# Altium PCB Twitch_Switch_PCB.PcbDoc (part 3 of 3)
Units mil, origin at the board's own origin, x right, y up, seen from the top; angles counter-clockwise.
Board outline 3095 x 1923 mil, 2 copper layers (Top Layer, Bottom Layer); 103 components, 59 nets, 319 pads, 189 vias.
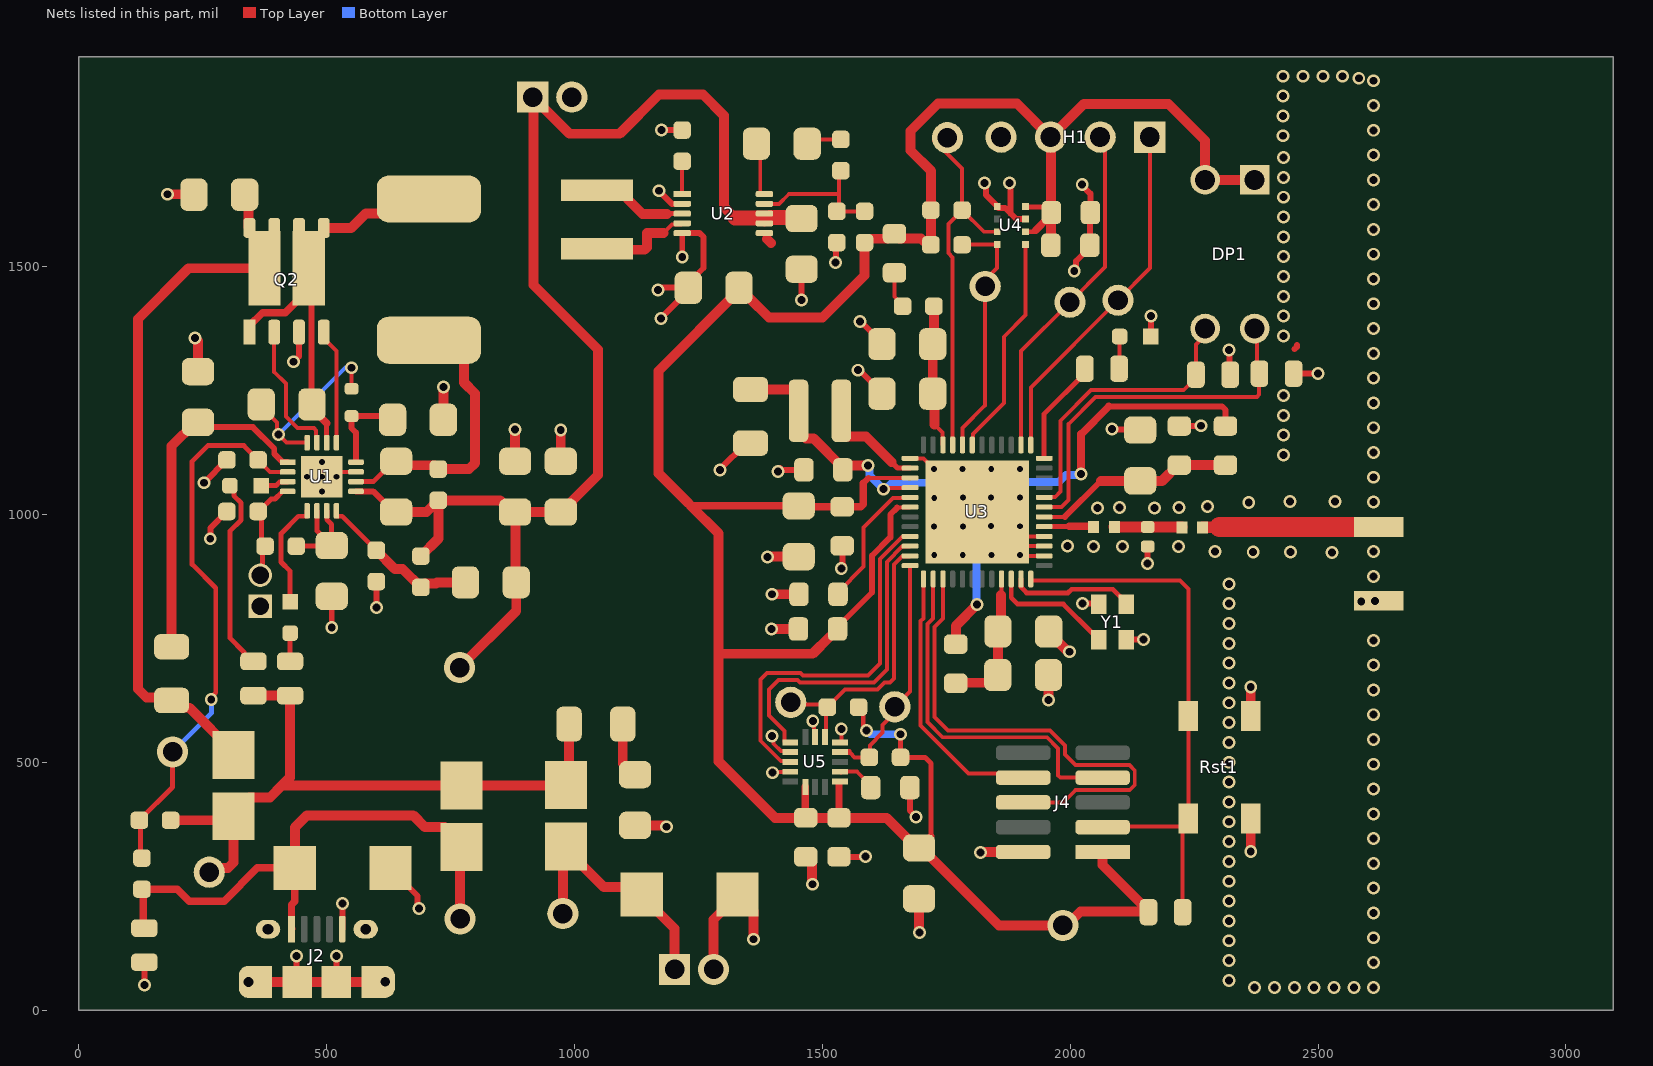
[diagram p2: the nets of this part, all layers, seen from the top]

## Part data (continued)
R23: library part RMCF0603JT1R00, "Res Thick Film 0603 1 Ohm 5% 0.1W(1/10W) ±200ppm/C Molded SMD Paper T/R", Case Code (Imperial)=0603, Case Code (Metric)=1608, Manufacturer="Stackpole Electronics", Max Operating Temperature=155°C, Max Power Dissipation=100mW, Min Operating Temperature=-55°C, Resistance=1R, Resistor Type="Thick Film", Temperature Coefficient=200ppm/°C, Tolerance=5%, Case/Package=0603, Category="Chip SMD Resistors", ComponentLink1Description=http://components.arrow.com/part/dataview/47073886S9848743N1174?src-supplier=Arrow+Electronics, ComponentLink1URL=http://components.arrow.com/part/dataview/47073886S9848743N1174?src-supplier=Arrow+Electronics, ComponentLink2Description=https://www.seielect.com/catalog/SEI-RMCF_RMCP.pdf?src-supplier=Avnet, ComponentLink2URL=https://www.seielect.com/catalog/SEI-RMCF_RMCP.pdf?src-supplier=Avnet, ComponentLink3Description=https://www.seielect.com/Catalog/SEI-RMCF_RMCP.pdf?src-supplier=Digi-Key, ComponentLink3URL=https://www.seielect.com/Catalog/SEI-RMCF_RMCP.pdf?src-supplier=Digi-Key, ComponentLink4Description=https://www.seielect.com/catalog/SEI-Packaging.pdf?src-supplier=Digi-Key, ComponentLink4URL=https://www.seielect.com/catalog/SEI-Packaging.pdf?src-supplier=Digi-Key, Construction=Rectangular, Contact Plating=Tin,Matte, Depth=0.8mm, Features="Automotive AEC-Q200", Height=0.022inch, Length=0.061inch, Manufacturer Part Number=RMCF0603JT1R00, Military Standard=Not, Mount="Surface Mount", Number of Terminations=2, Packaging="Tape and Reel", Pricing 1="1=0.10000, 10=0.02100, 100=0.00840, 1000=0.00379, 2500=0.00329 (USD)", Radiation Hardening=No, RoHS=Yes, RoHS Compliant=Yes, Series=RMCF, Stock 1=79282, Supplier 1=Digi-Key, Width=0.031inch
R25: library part 73L2R20J, "Res Thick Film 0603 0.2 Ohm 5% 1/10W ±300ppm/C Molded SMD SMD Paper T/R"
Rst1: library part PTS647SK38SMTR2LFS, "Switch Tactile N.O. SPST Round Button Gull Wing 0.05A 12VDC 100000Cycles 2.45N SMD T/R", Manufacturer="ITT C&K", Max Operating Temperature=70°C, Min Operating Temperature=-20°C, Operating Force=250gf, Ratings=IP40, Actuator Type=Standard, Category="Tactile Switches", ComponentLink1Description=https://www.ckswitches.com/media/2567/pts647.pdf?src-supplier=Digi-Key, ComponentLink1URL=https://www.ckswitches.com/media/2567/pts647.pdf?src-supplier=Digi-Key, Illumination Type=Non-Illuminated, Manufacturer Part Number=PTS647SK38SMTR2LFS, Mechanical Life=100000Cycles, Mount="Surface Mount", Packaging="Tape and Reel", Pricing 1="1=0.13000, 10=0.12700, 25=0.12080, 100=0.10970, 250=0.10308, 500=0.09432, 1000=0.07897 (USD)", RoHS=No, Stock 1=62118, Supplier 1=Digi-Key, Switch Function=Off-Mom, Switch Travel=0.25mm, Termination="Gull Wing", Throw Configuration=SPST
RT1: library part NTCLE101E3C90173, "THERM NTC 10KOHM 3435K RADIAL", Case/Package=Radial, Manufacturer="Vishay BCcomponents", Max Operating Temperature=125°C, Max Power Dissipation=250mW, Min Operating Temperature=-40°C, Tolerance=1%, Category=Thermistors, ComponentLink1Description=http://www.vishay.com/docs/29152/ntcle101e3c9017x.pdf?src-supplier=Digi-Key, ComponentLink1URL=http://www.vishay.com/docs/29152/ntcle101e3c9017x.pdf?src-supplier=Digi-Key, Manufacturer Part Number=NTCLE101E3C90173, Mount="Through Hole", Packaging=Bulk, Pricing 1="1=1.78000, 5=1.71600, 10=1.39500, 25=1.20160, 50=1.04060, 100=0.94400, 500=0.79384, 1000=0.70802, 5000=0.64365 (USD)", RoHS=Yes, RoHS Compliant=Yes, Stock 1=1784, Supplier 1=Digi-Key
U1: "High Efficiency Synchronous Switch-Mode Charger Controller – Solar Battery Charger 16-VQFN -40 to 85", Case/Package="VQFN EP", Manufacturer="Texas Instruments", Max Operating Temperature=85°C, Max Supply Voltage=28V, Min Input Voltage=5V, Min Operating Temperature=-40°C, Operating Supply Current=25mA, Output Current=10A, Output Voltage=26V, Package Quantity=3000, Switching Frequency=600kHz, Category="Battery Management", ComponentLink1Description=https://datasheet.ciiva.com/15115/getdatasheetpartid-517726-15115144.pdf?src-supplier=Verical, ComponentLink1URL=https://datasheet.ciiva.com/15115/getdatasheetpartid-517726-15115144.pdf?src-supplier=Verical, ComponentLink2Description=https://datasheet.ciiva.com/1934/bq24650-1934895.pdf?src-supplier=Digi-Key, ComponentLink2URL=https://datasheet.ciiva.com/1934/bq24650-1934895.pdf?src-supplier=Digi-Key, ComponentLink3Description=https://datasheet.ciiva.com/3214/bq24650-3214319.pdf?src-supplier=Avnet, ComponentLink3URL=https://datasheet.ciiva.com/3214/bq24650-3214319.pdf?src-supplier=Avnet, Contact Plating=Gold, Lead Free="Lead Free", Manufacturer Part Number=BQ24650RVAR, Min Supply Voltage=5V, Number of Cells=123456, Number of Pins=16, Packaging="Tape and Reel", Pricing 1="1=4.94000, 10=4.44000, 25=4.19760, 100=3.45140, 250=3.09688, 500=2.98496, 1000=2.48125 (USD)", Radiation Hardening=No, RoHS=Yes, RoHS Compliant=Yes, Series=-, Stock 1=7704, Supplier 1=Digi-Key
U2: "IC REG BUCK BST ADJ 0.6A 10MSOP", Case/Package=MSOP, Manufacturer="Analog Devices / Linear Technology", Max Operating Temperature=85°C, Min Input Voltage=2.5V, Min Operating Temperature=-40°C, Output Current=600mA, Output Voltage=5.5V, Package Quantity=2500, Switching Frequency=2MHz, Category="Voltage Regulators - Switching", ComponentLink1Description=https://datasheet.ciiva.com/26899/ltc3440ems-trpbf-26899120.pdf?src-supplier=IIIC, ComponentLink1URL=https://datasheet.ciiva.com/26899/ltc3440ems-trpbf-26899120.pdf?src-supplier=IIIC, ComponentLink2Description=https://datasheet.ciiva.com/2031/3314-2031816.pdf?src-supplier=Digi-Key, ComponentLink2URL=https://datasheet.ciiva.com/2031/3314-2031816.pdf?src-supplier=Digi-Key, Efficiency=96%, Lead Free="Lead Free", Manufacturer Part Number=LTC3440EMS#TRPBF, Number of Outputs=1, Number of Pins=10, Output Type=Adjustable, Packaging="Tape and Reel", Pricing 1="1=6.71000, 10=6.06200, 25=5.78000, 100=4.79330, 250=4.37040, 500=4.08842, 1000=3.72400 (USD)", RoHS=Yes, RoHS Compliant=Yes, Series=-, Stock 1=8435, Supplier 1=Digi-Key, Synchronous Rectifier=Yes
U3: library part EFR32BG13P732F512GM48-B_1, "BLUE PREMIUM QFN48 2.4G 19 DBM B", Current - Receiving=11mA, Current - Transmitting=8.5mA, Frequency=2.4GHz, Manufacturer="Silicon Labs", Manufacturer Part Number=EFR32BG13P732F512GM48-B, Max Operating Temperature=85°C, Min Operating Temperature=-40°C, Category="RF Receivers, Transceivers", ComponentLink1Description=https://www.silabs.com/documents/login/data-sheets/efr32bg13-datasheet.pdf?src-supplier=Digi-Key, ComponentLink1URL=https://www.silabs.com/documents/login/data-sheets/efr32bg13-datasheet.pdf?src-supplier=Digi-Key, Data Rate=2Mbps, Interface=I2C,UART,USART, Memory Size=64KB, Number of GPIO=31, Packaging=Tray, Pricing 1="1=6.48000, 25=6.24040, 100=6.00030, 1000=5.98905 (USD)", RoHS=Yes, RoHS Compliant=Yes, Sensitivity=-102dBm, Stock 1=19, Supplier 1=Digi-Key
U4: "INFINEON - DPS310XTSA1 - Pressure Sensor, Barometric, 17.404 psi, 4.351 psi, 1.7 V, 3.6 V", Case/Package=LGA, Manufacturer=Infineon, Max Operating Temperature=85°C, Max Supply Voltage=3.6V, Min Operating Temperature=-40°C, Operating Pressure=17.4PSI, Category="Pressure Sensors", ComponentLink1Description=http://www.farnell.com/datasheets/2211517.pdf?src-supplier=Farnell, ComponentLink1URL=http://www.farnell.com/datasheets/2211517.pdf?src-supplier=Farnell, ComponentLink2Description=https://www.infineon.com/dgdl/Infineon-DPS310-DS-v01_00-EN.pdf?fileId=5546d462576f34750157750826c42242&src-supplier=Digi-Key, ComponentLink2URL=https://www.infineon.com/dgdl/Infineon-DPS310-DS-v01_00-EN.pdf?fileId=5546d462576f34750157750826c42242&src-supplier=Digi-Key, ComponentLink3Description=http://www.farnell.com/datasheets/2211517.pdf?src-supplier=Newark, ComponentLink3URL=http://www.farnell.com/datasheets/2211517.pdf?src-supplier=Newark, ComponentLink4Description=http://www.farnell.com/datasheets/2211517.pdf?src-supplier=Element14, ComponentLink4URL=http://www.farnell.com/datasheets/2211517.pdf?src-supplier=Element14, Halogen Free="Halogen Free", Interface=I2C,SPI, Lead Free="Lead Free", Manufacturer Part Number=DPS310XTSA1, Max Pressure=145PSI, Number of Pins=8, Output Type=SPI,I2C, Pressure Type="Vented Gauge", Pricing 1="1=2.89000, 5=2.68200, 10=2.22800, 25=1.85640, 50=1.65000, 100=1.56750, 500=1.32000, 1000=1.23750 (USD)", RoHS=Yes, RoHS Compliant=Yes, Stock 1=17160, Supplier 1=Digi-Key, Termination=SMD/SMT
U5: "Accelerometer Triple ±2g/±4g/±8g 2.5V 16-Pin QFN T/R", Case/Package=QFN, Manufacturer="NXP Freescale", Max Operating Temperature=85°C, Max Supply Voltage=3.6V, Min Operating Temperature=-40°C, Min Supply Voltage=1.95V, Package Quantity=1000, Axis="X, Y, Z", Bandwidth=400Hz, Category=Accelerometers, ComponentLink1Description=https://datasheet.ciiva.com/6484/mma8452q-6484545.pdf?src-supplier=Digi-Key, ComponentLink1URL=https://datasheet.ciiva.com/6484/mma8452q-6484545.pdf?src-supplier=Digi-Key, ComponentLink2Description=https://datasheet.ciiva.com/5296/mma8452q-64080-5296451.pdf?src-supplier=Mouser, ComponentLink2URL=https://datasheet.ciiva.com/5296/mma8452q-64080-5296451.pdf?src-supplier=Mouser, ComponentLink3Description=https://datasheet.ciiva.com/26025/mma8452q-26025828.pdf?src-supplier=Avnet+Europe, ComponentLink3URL=https://datasheet.ciiva.com/26025/mma8452q-26025828.pdf?src-supplier=Avnet+Europe, ComponentLink4Description=https://datasheet.ciiva.com/41459/001183459-da-01-en-ic-acceler-2g-4g-8-mma8452qr1-qfn-16-fre-41459457.pdf?src-supplier=Conrad, ComponentLink4URL=https://datasheet.ciiva.com/41459/001183459-da-01-en-ic-acceler-2g-4g-8-mma8452qr1-qfn-16-fre-41459457.pdf?src-supplier=Conrad, ComponentLink5Description=https://datasheet.ciiva.com/6484/mma8452q-6484518.pdf?src-supplier=Digi-Key, ComponentLink5URL=https://datasheet.ciiva.com/6484/mma8452q-6484518.pdf?src-supplier=Digi-Key, ComponentLink6Description=https://datasheet.ciiva.com/6484/mma8452q-6484517.pdf?src-supplier=Digi-Key, ComponentLink6URL=https://datasheet.ciiva.com/6484/mma8452q-6484517.pdf?src-supplier=Digi-Key, ComponentLink7Description=https://datasheet.ciiva.com/3271/mma8452q-3271581.pdf?src-supplier=Avnet, ComponentLink7URL=https://datasheet.ciiva.com/3271/mma8452q-3271581.pdf?src-supplier=Avnet, Contact Plating=Gold, Depth=3mm, Interface=I2C, Length=3mm, Manufacturer Part Number=MMA8452QR1, Mount="Surface Mount", Number of Pins=16, Output Type=I2C,Digital, Packaging="Tape and Reel", Pricing 1="1=2.49000, 10=1.57000, 25=1.51000, 50=1.46000, 100=1.40000 (USD)", Radiation Hardening=No, REACH SVHC="No SVHC", Resolution=12b, RoHS=Yes, RoHS Compliant=Yes, Series=-, Supplier 1=Newark, Weight=0.001122oz
Y1: library part 8Y38472012, Manufacturer=TXC, Manufacturer Part Number=8Y38472012, Pricing 1="1=0.78000, 10=0.69000, 50=0.64500, 100=0.57000, 500=0.54000, 1000=0.45000 (USD)", RoHS=No, Stock 1=13540, Supplier 1=Digi-Key

## Via types
v1: diameter 26, hole 16, Top Layer to Bottom Layer, 168 vias
v2: diameter 24, hole 12, Top Layer to Bottom Layer, 21 vias

## Nets (pads, with @x,y where several pads share a name; then routed paths per layer and width w, separated by ;. In a path a pad name is that pad's centre, name@x,y a point inside that pad or via, vN(x,y) a via of type N, cw(c..) or ccw(c..) an arc to the next point about the centre after c; other vN are vias at no path point)
+3V3_VIN: C13.1 C14.1 C15.1 C16.1 C17.1 C23.1 C24.2 C28.1 C29.1 DP1.1 DP1.3 FB1.1 H1.3 J4.1 R13.2 R16.2 R18.2 R19.2 R20.2 R24.2 TP6.1 U2.6 U3.39 U3.42 U4.6 U4.8 U5.1 U5.14 | length 5879.9
  Top Layer w8: 1229.5,1022.5 1234.82,1017.18 ; C16.1@1452,1017.18 C16.1@1453.81,1015.37 ; C28.1@1465.52,388.89 C28.1@1466.41,388 ; C23.1@1514.35,752.98 1515.13,752.98 1530.37,768.22 C23.1@1530.37,769 C23.1@1530.37,772.94 ; U5.1@1533.41,459.26 U5.1@1535.41,461.26 ; 1593.1,1073.9 U3.39@1676.76,1073.9 U3.39@1675.74,1072.88 ; 1650.72,1013.72 1675.65,1013.72 U3.42@1676.76,1014.84 ; U4.8@1909.79,1621.48 U4.8@1911.09,1620.17 ; C14.1@1955.93,1599.2 C14.1@1955.93,1608.59 ; C15.1@1960.88,1543.09 C15.1@1961.38,1543.59 ; C14.1@1960.89,1620.17 C14.1@1961.06,1620 ; TP6.1@1985,170.77 TP6.1@1992.51,170.77 ; 2140.27,217.34 2144.45,217.34 2157.8,204 R24.2@2157.8,197.77 R24.2@2156.56,199
  Top Layer w10: v1@1582.28,573.7 R19.2@1582.28,601.89 ; v1(1657.5,556.5) R20.2@1657.5,510 1707,510 1719,498 C24.2@1719,351.18 ; U4.6@1909.79,1570.29 1927.02,1570.29 1929.91,1573.18 ; U4.8@1911.09,1620.17 C14.1@1960.89,1620.17
  Top Layer w12: C23.1@1530.37,772.94 1600,842.57 1600,916.88 1637,953.88 1637,1000 1650.72,1013.72 ; 1582,1062.8 1593.1,1073.9
  Top Layer w15: 1234.82,1017.18 C16.1@1452,1017.18 ; C16.1@1453.81,1015.37 C17.1@1540,1015.37 1577.31,1015.37 1582,1020.06 1582,1062.8 ; C28.1@1465.52,388.89 U5.14@1465.52,450.44 ; C29.1@1533.41,388 U5.1@1533.41,459.26 ; R19.2@1572.9,611.26 R19.2@1582.28,601.89 ; C24.2@1690.08,327.18 C24.2@1695,327.18 C24.2@1696.52,327.18 ; C24.2@1699.92,327.18 C24.2@1696.52,327.18 ; C24.2@1719,351.18 1716.1,348.28 1716.1,346.76 C24.2@1696.52,327.18 ; 1929.91,1573.18 C14.1@1955.93,1599.2
  Top Layer w20: 1229.5,1022.5 1169,1083 1169,1289.66 1331.15,1451.81 1331.81,1451.81 C13.1@1331.81,1454.52 ; 1234.82,1017.18 1290,962 1290,719 ; C13.1@1331.81,1457.39 C13.1@1331.81,1454.52 ; 1388,1556 1396.05,1547.94 ; C23.1@1514.35,752.98 1480.37,719 1290,719 ; C24.2@1690.08,327.18 1629.26,388 C29.1@1533.41,388 C28.1@1466.41,388 1404,388 1290,502 1290,719 ; C24.2@1699.92,327.18 1856.33,170.77 TP6.1@1985,170.77 ; C15.1@1961.38,1543.59 1961.38,1608.59 1961.06,1608.9 1961.06,1620 1961.06,1760.28 H1.3@1960.25,1761.09 ; TP6.1@1992.51,170.77 2020.74,199 R24.2@2156.56,199 ; J4.1@2065.12,319.07 2065.12,292.5 2140.27,217.34 ; DP1.1@2372,1675 DP1.3@2272,1675 2272,1754.46 2198.46,1828 2027.16,1828 H1.3@1960.25,1761.09 ; C13.1@1331.81,1454.52 1349.08,1437.25 1351.96,1437.25 1392.2,1397 1500,1397 1585,1482 R13.2@1585,1548.5 1592.72,1556.22 1631.07,1556.22 1641.31,1566.46 FB1.1@1645.25,1566.46 1654.91,1556.8 1698.87,1556.8 1703.86,1551.81 1711.04,1551.81 R18.2@1718.75,1544.09 R16.2@1718.75,1614.09 1718.75,1693.42 1677.75,1734.42 1677.75,1773.76 1732.99,1829 1892.34,1829 H1.3@1960.25,1761.09
  Bottom Layer w15: v1(1589,564) 1596.5,556.5 v1(1657.5,556.5)
+4V2_VBAT: C7.1 C8.1 C9.2 C10.2 C11.1 J3.1 R9.2 R25.2 TP5.1 U1.9 U2.7 U2.8 | length 2692.9
  Top Layer w12: U1.9@558.9,1046.47 593.43,1046.47 635.08,1004.82 C10.2@640,1004.82 ; J3.1@915.63,1842 J3.1@917,1840.63 ; C11.1@1448.32,1587.32 C11.1@1458,1597
  Top Layer w20: C10.2@640,1004.82 701.31,1004.82 R25.2@725,1028.5 ; R9.2@690,916 725,951 R25.2@725,1028.5 ; TP5.1@768,691 882.18,805.18 C9.2@882.18,863 881.09,864.09 881.09,1003.73 C7.1@880,1004.82 ; 1323.36,1598.36 1301,1620.72 1301,1805 1259,1847 1170,1847 1091,1768 989.63,1768 917,1840.63 917,1462.77 1047,1332.77 1047,1079.82 994.48,1027.3 994.48,1024.42 974.88,1004.82 C8.1@972,1004.82 C7.1@880,1004.82 ; 1393.36,1598.36 1394,1599 ; C11.1@1456,1599 C11.1@1458,1597 ; R25.2@725,1028.5 849.35,1028.5 873.03,1004.82 C7.1@880,1004.82
  Top Layer w30: 1323.36,1598.36 1393.36,1598.36 ; 1394,1599 C11.1@1456,1599
+VIN_SOLAR: D3.2 D6.1 J1.1 TP3.1 | length 510.6
  Top Layer w20: TP3.1@976.26,194.75 976.26,317.35 D3.2@989.74,317.35 ; D3.2@983,329.99 983,324.09 D3.2@989.74,317.35 ; J1.1@1201.63,82 1201.63,164.94 1135.54,231.03 D6.1@1135.54,233 1120.54,248 1059.09,248 D3.2@989.74,317.35
+VIN_USB: D1.2 D5.1 J2.1 R4.2 R12.2 TP1.1 | length 1166
  Top Layer w15: R12.2@140.57,174.02 R12.2@132,165.45 129.54,167.91 129.54,241.35 R4.2@127.09,243.81 198.51,243.81 222.32,220 293,220 360,287 D5.1@435.54,287 435.54,219.25 428.82,212.53 J2.1@428.82,163.3 J2.1@429.43,163.91 ; D1.2@731.27,369.71 D1.2@737.18,369.71 ; D1.2@772,328.98 D1.2@772,334.89
  Top Layer w20: D5.1@435.54,287 435.54,368.54 460,393 674.47,393 697.75,369.71 D1.2@731.27,369.71 ; D1.2@737.18,369.71 D1.2@772,334.89 ; TP1.1@769,184 D1.2@769,325.98
+VIN_USB_SOLAR: D1.1 D2.2 D3.1 R1.2 R3.2 R7.1 R8.1 TP2.1 | length 1368.6
  Top Layer w20: R3.2@184.99,383 D2.2@312,383 ; TP2.1@262.91,278.26 271.14,286.49 300.49,286.49 312,298 D2.2@312,383 ; D2.2@312,390.99 312,396.9 344.32,429.22 385.5,429.22 409.28,453 ; D2.2@321.99,381 319.99,383 D2.2@312,383 ; R7.1@352,634.55 R8.1@426,634.55 426,469.72 409.28,453 ; R1.2@988.87,577 988.87,459.87 D3.1@983,454.01 981.99,453 D1.1@772,453 409.28,453
ACC_INT1: U3.45 U5.11 | length 750.3
  Top Layer w8: U5.11@1435.01,500.63 1433.01,502.64 1415.84,502.64 1375,543.47 1375,667 1388,680 1455.48,680 1460.48,675 1591.51,675 1616,699.49 1616,910.26 1660.41,954.67 1675.65,954.67 U3.45@1676.76,955.79
ACC_INT2: U3.46 U5.9 | length 666.7
  Top Layer w8: U5.9@1435.01,540 1425.01,540 1423.01,542.01 1423.01,563 1392,594.01 1392,647 1411,666 1449.68,666 1454.68,661 1604,661 1630,687 1630,904.46 1660.53,934.98 1675.65,934.98 U3.46@1676.76,936.1
ADC0_EXTN: H1.1 TP11.1 U3.25 | length 720.9
  Top Layer w8: U3.25@1920.27,1140.24 1920.27,1256.11 TP11.1@2096.25,1432.09 2161,1496.84 2161,1760.34 H1.1@2160.25,1761.09
ADC0_EXTP: H1.2 TP12.1 U3.26 | length 695.3
  Top Layer w8: U3.26@1900.58,1140.24 1900.58,1329.42 TP12.1@1999.25,1428.09 2070.3,1499.15 2070.3,1751.03 H1.2@2060.25,1761.09
ALT_INT: U3.31 U4.5 | length 449.1
  Top Layer w8: U3.31@1802.16,1140.24 1803.28,1141.35 1803.28,1162.63 1865.92,1225.27 1865.92,1358.47 1909.79,1402.34 U4.5@1909.79,1544.7
AVDD: C20.1 C22.1 R23.2 U3.34 | length 289.4
  Top Layer w8: 1726,1181 1741.98,1165.02 1741.98,1141.35 U3.34@1743.1,1140.24
  Top Layer w20: R23.2@1724.74,1420.09 1724.74,1345.9 C20.1@1722.43,1343.59 C22.1@1722.43,1243.59 1726,1240.02 1726,1181
BQ_VCC: C4.1 D2.1 Q2.7 Q2.8 Q2.@374.51,1496.62 R2.2 | length 1381.1
  Top Layer w20: D2.1@312,515.01 312,520.91 222.87,610.04 201.82,610.04 181.46,630.41 136.59,630.41 119,648 119,1394.4 221.22,1496.62 Q2.@374.51,1496.62 Q2.@374.51,1487.09 ; C4.1@334.36,1649.92 C4.1@334.36,1645 341.99,1637.37 341.99,1580.13 Q2.8@344,1578.12
BQ_VCC_BYP: C1.1 R2.1 U1.1 | length 707.9
  Top Layer w8: R2.1@187,733.13 R2.1@196.84,733.13 ; C1.1@240,1185.82 C1.1@249.78,1176.04
  Top Layer w12: C1.1@249.78,1176.04 350.96,1176.04 394,1133 394,1122.39 410.87,1105.53 U1.1@421.1,1105.53
  Top Layer w20: R2.1@187,733.13 187,1137.74 235.08,1185.82 C1.1@240,1185.82
BQ_VFB: C9.1 R9.1 R11.2 U1.8 | length 334.3
  Top Layer w10: U1.8@519.53,1007.1 519.53,996.87 520.04,996.35 531.14,996.35 R11.2@600,927.5
  Top Layer w20: R11.2@600,927.5 637.24,890.25 652.76,890.25 R9.1@690,853.01 697.72,860.72 719.98,860.72 722.26,863 C9.1@779.82,863
BQ_VREF: C3.1 R6.2 U1.6 U1.7 | length 228.5
  Top Layer w10: R6.2@438.5,936 439.09,936.59 509.41,936.59 C3.1@510,937.18 ; U1.6@480.16,1007.1 480.16,966.85 509.83,937.18 C3.1@510,937.18 ; U1.7@499.84,1007.1 500.35,1006.59 500.35,989.39 510,979.74 C3.1@510,937.18
BTST: C6.1 D4.1 U1.16 | length 394.7
  Top Layer w8: C6.1@367.82,1222 367.82,1217.08 399.83,1185.07 399.83,1164.17 v1(403,1161) 419.1,1144.9 U1.16@460.47,1144.9 460.47,1152.38 U1.16@458.96,1153.89 ; D4.1@550,1253.56 v1(550,1296)
  Bottom Layer w8: v1(403,1161) 538,1296 v1(550,1296)
DECOUPLE: C21.1 U3.41 | length 275.2
  Top Layer w8: C21.1@1531.37,839 1531.37,842.94 1583,894.57 1583,974 1642.41,1033.41 1675.65,1033.41 U3.41@1676.76,1034.53
DIP_BIT0: DP1.2 R21.2 U3.19 | length 754.8
  Top Layer w8: U3.19@1947.24,1014.84 1981.84,1014.84 1996,1029 1996,1182 2051,1237 2376.31,1237 2381,1241.69 2381,1283.45 R21.2@2381.55,1284 2376.78,1288.78 2376.78,1370.22 DP1.2@2372,1375
DIP_BIT1: DP1.4 R22.2 U3.20 | length 596.9
  Top Layer w8: U3.20@1947.24,1034.53 1959.05,1034.53 1960.17,1035.65 1969.65,1035.65 1980,1046 1980,1189 2042.11,1251.11 2228.89,1251.11 2253.55,1275.77 R22.2@2253.55,1282 2253.55,1342.52 2272,1360.97 DP1.4@2272,1375
FB_LTC3440: R13.1 R14.2 R17.2 U2.9 | length 300.7
  Top Layer w8: U2.9@1382.89,1626.69 1412.69,1626.69 1432,1646 1530,1646 1533,1643 ; R14.2@1537,1693.5 1533,1689.5 1533,1643 ; R13.1@1585,1611.5 R17.2@1529,1611.5 1533,1615.5 1533,1643
GND: AT1.GND C1.2 C2.2 C3.2 C4.2 C5.2 C7.2 C8.2 C11.2 C13.2 C14.2 C15.2 C16.2 C17.2 C18.2 C19.2 C20.2 C21.2 C22.2 C23.2 C24.1 C25.2 C26.2 C27.2 C28.2 C29.2 C30.2 C31.2 C32.2 D5.2 D6.2 H1.4 J1.2 J2.5 J2.S1 J2.S2 J2.S3 J2.S4 J2.S5 J2.S6 J3.2 J4.2 LED3.C Q2.3 R5.1 R10.1 R11.1 R12.1 R15.1 R17.1 R21.1 R22.1 Rst1.1 Rst1.2 RT1.1 U1.11 U1.PAD U2.2 U2.5 U3.14 U3.15 U3.16 U3.37 U4.1 U4.7 U5.5 U5.7 U5.10 U5.12 Y1.2 Y1.4 | length 4642.6
  Top Layer w8: J2.S4@439,58.64 J2.S4@440.63,57.01 ; v2(490,1076) 499.84,1085.84 U1.11@558.9,1085.84 ; v1(1398,553) 1401.44,549.56 1401.44,537.42 1416.54,522.32 1433.01,522.32 U5.10@1435.01,520.32 ; v1(1399,479) 1399.97,479.97 1434.04,479.97 U5.12@1435.01,480.95 ; v1@1483,584 1482.57,583.57 v1(1480.53,583.57) 1483.2,580.89 1483.2,552.83 U5.7@1485.21,550.83 ; U5.5@1535.41,540 1536,540 1538,542.01 v1(1538,567) ; U3.37@1676.76,1113.27 1703.73,1113.27 U3.14@1812,1005 U3.14@1861.21,955.79 ; v1(1827,1669) v1@1830.18,1665.82 ; U4.1@1852.7,1621.48 U4.1@1855.59,1618.59 ; U3.14@1947.24,916.42 1900.58,916.42 U3.14@1880.9,936.1 ; U3.15@1947.24,936.1 U3.14@1880.9,936.1 ; U3.16@1947.24,955.79 U3.14@1861.21,955.79 ; v1(2008,1491) v1@2011.44,1494.44 ; v1@2024,1663.48 v1(2024,1666) ; C15.2@2039.62,1539.15 C15.2@2039.62,1543.09 C15.2@2040.12,1543.59 ; C14.2@2040.12,1608.59 C14.2@2040.62,1609.09 C14.2@2040.42,1609.29 ; U3.14@1861.21,955.79 U3.14@1880.9,936.1
  Top Layer w10: v1(2587,824) 2614,824 v1(2615,825) 2621,825 AT1.GND@2622,826
  Top Layer w12: v1(132,51) R12.1@132,96.55 ; C4.2@231,1646 C4.2@232,1645 ; v1(252.5,1064) R5.1@298.5,1110 ; v1(265,951) 265,972.5 R10.1@298.5,1006 ; v1(433,1308) 444,1319 Q2.3@444,1367.88 ; J2.S4@439,58.64 v1(439,109) ; v1(510,772) C3.2@510,834.82 ; J2.S5@519.37,57.01 520,57.64 v1(520,109) ; J2.5@531.18,163.3 531.59,163.71 531.59,214.59 v1(532,215) ; v1(600,812) R11.1@600,864.5 ; D5.2@628.46,287 628.46,285.03 683.32,230.17 683.32,207.68 v1(686,205) ; v1(1168,1453) 1172.39,1457.39 C13.2@1229.45,1457.39 ; v1(1170,1653) 1196.31,1626.69 U2.2@1217.11,1626.69 ; v1(1174,1395) 1174,1396.01 1228.44,1450.45 1229.45,1450.45 C13.2@1229.45,1457.39 ; v1(1175.5,1775.5) R15.1@1217,1775.5 ; v1(1217.11,1519.11) U2.5@1217.11,1567.63 1252.37,1567.63 1260,1560 1260,1497.08 1229.45,1466.53 C13.2@1229.45,1457.39 ; v1(1293,1090) 1293,1090.85 1346.01,1143.87 C18.2@1355,1143.87 ; v1@1413,1090 C19.2@1462.63,1090 ; v1(1458,1433) C11.2@1458,1494.64 ; v1(1526,1508) 1527.5,1509.5 1527.5,1547 R17.1@1529,1548.5 ; C29.2@1533.41,309.26 1586.26,309.26 v1(1587,310) ; v1@1540,894.62 C17.2@1540,936.63 ; v1(1572,1291) 1574.79,1291 1620.07,1245.72 C22.2@1620.07,1243.59 ; v1(1576,1389) 1577.79,1389 1620.07,1346.72 C20.2@1620.07,1343.59 ; C25.2@1676.37,449 1676.37,402.63 v1(1689,390) ; v1@1830.18,1665.82 1830.18,1644 U4.1@1852.7,1621.48 ; U4.1@1855.59,1618.59 1868.2,1618.59 1879.55,1607.24 ; v1(1877,1669) 1879.55,1666.45 1879.55,1607.24 ; U4.7@1909.79,1595.89 1890.9,1595.89 1879.55,1607.24 ; C31.2@1956.36,761.86 C31.2@1956.36,764 ; v1@1995.22,723 v1(1998,723) ; v1@2011.44,1494.44 2011.44,1510.98 C15.2@2039.62,1539.15 ; v1@2024,1663.48 2040.42,1647.06 C14.2@2040.42,1609.29 ; v1(2025,820) 2055.87,820 Y1.4@2057.44,818.43 ; C15.2@2040.12,1543.59 C14.2@2040.12,1608.59 ; v1(2084,1172) 2084.91,1171.09 2140.09,1171.09 C32.2@2141,1170.18 ; Y1.2@2112.56,747.57 2112.99,748 v1(2148,748) ; v1(2156,901) C30.2@2156,935.31 ; LED3.C@2162.5,1359 2162.75,1359.25 2162.75,1399.75 v1(2163,1400) ; C27.2@2220,1178.37 2220.31,1178.69 2263.68,1178.69 v1(2264,1179) ; v1(2320,1332) 2321.22,1330.78 2321.22,1283.22 R22.1@2322.45,1282 ; R21.1@2452.22,1285.78 R21.1@2450.45,1284 v1(2500,1284) ; 2452.22,1333.44 2457,1338.21 2457,1342
  Top Layer w20: v1(179,1646) C4.2@231,1646 ; v1(234,1356) 240,1350 C1.2@240,1288.18 ; J2.S3@366,57 J2.S6@594,57 ; C5.2@735.18,1191 v1(735.18,1256.82) ; C7.2@880,1107.18 v1(880,1171) ; C8.2@972,1107.18 v1(972,1170) ; C2.2@1122,372.82 1180.56,372.82 1183.38,370 v1(1185,370) ; J1.2@1280.37,82 1280.37,182.94 D6.2@1328.46,231.03 ; D6.2@1328.46,233 1360.98,200.48 v1(1361,143) ; v1(1389,914) 1389.82,914.82 C16.2@1452,914.82 ; v1(1397,769) C23.2@1451.63,769 ; v1(1398,839) C21.2@1452.63,839 ; v1(1410,1087) v1@1413,1090 ; C28.2@1466.41,309.26 1469.31,309.26 1479,299.58 1479,255 v1(1480,254) ; v1(1538,891) 1538,892.62 v1@1540,894.62 ; v1@1695,158 C24.1@1695,224.82 ; v1(1819,318) 1820.07,319.07 J4.2@1904.88,319.07 ; v1(1956,626) C26.2@1956,676 ; C31.2@1956.36,761.86 v1@1995.22,723 ; v1(2364,320) Rst1.2@2363.99,386.65 ; Rst1.1@2363.99,593.35 v1(2364,652)
  other v1: 2372,46 2412,46 2452,46 2492,46 2532,46 2572,46 2612,46 2320,60 2612,96 2320,100 2320,140 2612,146 1696,157 2320,180 2612,196 2320,220 2612,246 2320,260 2612,296 2320,300 2320,340 2612,346 2320,380 2612,396 2320,420 2612,446 2320,460 2612,496 2320,500 2320,540 2612,546 2320,580 2612,596 2320,620 2612,646 2320,660 2612,696 2320,700 2320,740 2612,746 2320,780 2320,820 2320,860 2612,875 2528,923 2369,924 2444,924 2292,925 2612,925 2047,935 2105,935 2218,935 1994,936 2055,1013 2169.89,1012.71 2099,1014 2219,1014 2277,1016 2360,1024 2612,1025 2443,1026 2534,1026 2612,1075 2430,1120 2612,1125 2430,1160 2612,1175 2430,1200 2612,1225 2430,1240 2612,1275 2612,1325 2430,1360 2612,1375 2430,1400 2612,1425 2430,1440 2612,1475 2430,1480 2430,1520 2612,1525 2430,1560 2612,1575 2430,1600 2612,1625 2430,1640 2612,1675 2430,1680 2430,1720 2612,1725 2429.48,1764.02 2612,1775 2429.48,1804.02 2612,1825 2429.48,1844.02 2612,1875 2582,1880 2429.48,1884.02 2469.48,1884.02 2509.48,1884.02 2549.48,1884.02
  other v2: 1783.08,918.47 1898.47,918.42 1725.54,918.53 1840.69,918.52 1725.48,976.13 1783.23,975.81 1840.32,976.36 1898.51,976.15 1725.53,1033.61 1783.13,1033.78 1840.43,1034.34 1898.52,1033.88 490,1046.47 460.47,1076 519.53,1076 1725.46,1091.47 1782.87,1091.47 1898.56,1091.48 1840.49,1091.54 490,1105.53
HFXI: U3.10 Y1.3 | length 251.6
  Top Layer w10: U3.10@1880.9,869.76 1880.9,831.96 1893.86,819 1986.01,819 2042.76,762.25 2046.69,762.25 2057.44,751.5 Y1.3@2057.44,747.57
HFXO: U3.11 Y1.1 | length 251.2
  Top Layer w10: U3.11@1900.58,869.76 1900.7,869.65 1900.7,853.23 1912.09,841.83 1995.31,841.83 2002.59,849.12 2085.81,849.12 2112.56,822.37 Y1.1@2112.56,818.43
HIDRV: Q2.2 U1.15 | length 278
  Top Layer w8: Q2.2@394,1367.88 394,1287.4 417.44,1263.96 417.44,1197.55 440.99,1174 473.96,1174 478.65,1169.31 478.65,1146.41 U1.15@480.16,1144.9
I2C_CLK_ACC: R20.1 TP10.1 U3.48 U5.4 | length 503.7
  Top Layer w8: 1554.11,522.32 1537.41,522.32 U5.4@1535.41,520.32 1537.41,518.31 1556.47,518.31 1564.79,510 R20.1@1594.5,510 1595.5,511 1595.5,534 1621.51,560 1621.51,574.98 1646,599.47 TP10.1@1646,612 1676.76,642.76 U3.48@1676.76,896.73
I2C_CLK_ALT: R18.1 TP8.1 U3.32 U4.4 | length 503.9
  Top Layer w8: R18.1@1781.74,1544.09 1782.05,1544.4 1852.4,1544.4 1852.4,1497.45 1828.25,1473.3 TP8.1@1828.25,1460.09 1828.25,1220.25 1782.47,1174.47 U3.32@1782.47,1140.24
I2C_DATA_ACC: R19.1 TP9.1 U3.47 U5.6 | length 568.2
  Top Layer w8: TP9.1@1436,621 1440.87,616.13 1505.04,616.13 R19.1@1509.91,611.26 ; U5.6@1504.89,550.83 1506.9,552.83 1506.9,608.25 R19.1@1509.91,611.26 ; U3.47@1676.76,916.42 1675.65,915.3 1660.64,915.3 1644,898.66 1644,669 1636,661 1625,661 1611,647 1545.65,647 R19.1@1509.91,611.26
I2C_DATA_ALT: R16.1 TP7.1 U3.33 U4.3 | length 741.5
  Top Layer w8: TP7.1@1725.25,1754.09 1781.74,1697.59 R16.1@1781.74,1614.09 ; U3.33@1762.79,1140.24 1762.79,1518.66 1754.03,1527.42 1754.03,1586.37 R16.1@1781.74,1614.09 ; U4.3@1852.7,1570.29 1825.54,1570.29 R16.1@1781.74,1614.09
LED_GPIO: R26.1 U3.24 | length 214.8
  Top Layer w10: U3.24@1947.24,1113.27 1947.24,1202.83 2029.55,1285.14 R26.1@2029.55,1294
LODRV: Q2.4 U1.13 | length 233.6
  Top Layer w8: Q2.4@494,1367.88 494,1354.89 519.53,1329.36 U1.13@519.53,1144.9
MMA_BYP: C25.1 U5.2 | length 80.6
  Top Layer w8: U5.2@1537.41,478.94 U5.2@1535.41,480.95 1569.62,480.95 1597.63,452.94 C25.1@1597.63,449
MPPSET: R3.1 R4.1 R5.2 TP4.1 U1.2 | length 1117.2
  Top Layer w8: R5.2@361.5,1110 385.65,1085.84 U1.2@421.1,1085.84
  Top Layer w10: R4.1@127.09,306.8 124.54,309.35 124.54,380.46 R3.1@122,383 189,450 TP4.1@189,521 TP4.1@191.5,518.5 ; v1(267,627) 267,631.33 276,640.33 276,851.66 228.33,899.34 228.33,1107 260.05,1138.72 332.78,1138.72 R5.2@361.5,1110
  Bottom Layer w10: TP4.1@189,521 267,599 v1(267,627)
NetAT1_FEED: AT1.FEED L5.2 | length 356.6
  Top Layer w22: L5.2@2266.87,974 2266.87,974.78 L5.2@2267.09,975 ; 2300,974 2301,975
  Top Layer w23: L5.2@2266.87,974 2300,974
  Top Layer w40: 2301,975 AT1.FEED@2622,975
NetC2_1: C2.1 R1.1 | length 113.8
  Top Layer w20: R1.1@1097.13,577 1097.13,497.17 1119.12,475.18 C2.1@1122,475.18
NetC30_1: C30.1 L4.2 L5.1 | length 136.7
  Top Layer w8: L5.1@2224.45,974.69 L5.1@2225.13,974
  Top Layer w23: L4.2@2088.87,975 2089.15,974.69 C30.1@2156,974.69 L5.1@2224.45,974.69
NetFB1_2: FB1.2 R23.1 | length 74.5
  Top Layer w8: FB1.2@1645.25,1487.72 1645.25,1439.22 1661.75,1422.72 R23.1@1661.75,1420.09
NetL3_1: L3.1 U3.38 | length 211
  Top Layer w10: 1639,1106 1651.42,1093.58 U3.38@1676.76,1093.58
  Top Layer w20: L3.1@1538.31,1209 1538.31,1166.69 1547.99,1157.01 1587.99,1157.01 1639,1106
NetL4_1: L4.1 U3.17 | length 100.5
  Top Layer w10: U3.17@1947.24,975.47 1997.47,975.47 1998,976
  Top Layer w15: 1998,976 L4.1@2046.13,976
  Top Layer w20: L4.1@2046.13,976 L4.1@2047.13,975
NetLED1_A: LED1.A R7.2 | length 397
  Top Layer w10: LED1.A@304.5,1058 312.45,1050.05 312.45,1037.85 327.22,1023.08 327.22,988.92 304.5,966.2 304.5,750.94 332.81,722.64 332.81,715.87 345.23,703.45 R7.2@352,703.45
NetLED2_A: LED2.A R8.2 | length 57.1
  Top Layer w10: R8.2@426,703.45 LED2.A@426,760.5
NetLED3_A: LED3.A R26.2 | length 65.4
  Top Layer w8: R26.2@2098.45,1294 2098.98,1294.53 2098.98,1358.47 LED3.A@2099.5,1359
NetR15_2: R15.2 U2.1 | length 66.2
  Top Layer w8: R15.2@1217,1712.5 1217,1648.37 1217.11,1648.27 U2.1@1217.11,1646.37
PAVDD: C18.1 C19.1 FB2.1 FB3.1 L3.2 U3.40 | length 1680.1
  Top Layer w8: L3.2@1436.45,1252.13 1451.69,1236.89 L3.2@1451.69,1209 1451.69,1202.55 1459.31,1194.93 L3.2@1459.31,1164.35 ; L3.2@1451.69,1189.04 1451.69,1168.85 L3.2@1466.93,1153.61 ; C19.1@1541.37,1093.94 C19.1@1541.37,1090 C19.1@1550.37,1099 ; v1(1623,1050.9) 1625.2,1053.09 1675.65,1053.09 U3.40@1676.76,1054.21
  Top Layer w12: 2078,1218 2305.97,1218 2313,1210.97 FB3.1@2313,1178.37
  Top Layer w15: 2021.91,1161.91 2078,1218
  Top Layer w16: v1(2021.91,1081.91) 2021.91,1161.91
  Top Layer w20: C18.1@1355,1252.13 L3.2@1436.45,1252.13 ; L3.2@1466.93,1153.61 1481.69,1153.61 C19.1@1541.37,1093.94 ; C19.1@1550.37,1099 v1(1592,1099) ; FB2.1@1769,738.37 1769,775 v1(1812,818)
  Bottom Layer w8: v1(1592,1099) v1@1595.44,1095.56
  Bottom Layer w12: v1@1594.68,1094.79 v1@1595.44,1095.56 ; v1(1623,1050.9) v1@1626.79,1050.9
  Bottom Layer w15: v1@1811,819 v1(1812,818)
  Bottom Layer w16: v1@1594.68,1094.79 1594.68,1079.22 v1(1623,1050.9) ; v1@1626.79,1050.9 1639.89,1064 1811,1064 ; v1@1811,819 1811,1064 ; v1(2021.91,1081.91) 2020,1080 1991.43,1080 1976.91,1065.48 1812.48,1065.48 1811,1064
PAVDD_BG: C27.1 C32.1 FB3.2 U3.18 | length 409
  Top Layer w8: U3.18@1947.24,995.16 1989.16,995.16 ; C27.1@2216.59,1098.93 2219.3,1098.93 C27.1@2220,1099.63
  Top Layer w12: 1989.16,995.16 2061.82,1067.82
  Top Layer w20: 2061.82,1067.82 C32.1@2141,1067.82 2185.48,1067.82 C27.1@2216.59,1098.93 ; C27.1@2220,1099.63 FB3.2@2313,1099.63
PH: C6.2 L1.1 Q2.1 Q2.5 Q2.6 Q2.@463.49,1496.62 U1.14 | length 850.8
  Top Layer w10: U1.14@499.84,1144.9 499.84,1184.02
  Top Layer w12: Q2.@463.49,1496.62 Q2.@469,1491.11 ; Q2.@469,1454.1 469,1223.18 C6.2@470.18,1222 ; Q2.@469.99,1454.1 Q2.@469.99,1490.12
  Top Layer w15: Q2.1@344,1380.87 370.38,1407.25 416.64,1407.25 Q2.@463.49,1454.1 ; C6.2@470.18,1222 470.18,1213.68 499.84,1184.02
  Top Layer w20: Q2.1@344,1367.88 Q2.1@344,1380.87 ; Q2.@463.49,1496.62 463.49,1539.14 Q2.@494.23,1569.89 ; Q2.5@494,1578.12 549.46,1578.12 578.83,1607.49 676.99,1607.49 L1.1@706,1636.5
REGN: C5.1 D4.2 U1.12 | length 190.7
  Top Layer w12: D4.2@557.78,1192.63 D4.2@551.97,1198.44 ; U1.12@558.9,1105.53 558.9,1165.1 550,1174 D4.2@550,1198.44 D4.2@551.97,1198.44 ; C5.1@632.82,1191 625.38,1198.44 D4.2@551.97,1198.44
RESETn: J4.3 R24.1 Rst1.3 Rst1.4 U3.12 | length 1147.6
  Top Layer w8: U3.12@1920.27,869.76 1920.27,868.12 1921.39,867 2221,867 2238.01,849.99 Rst1.3@2238.01,593.35 Rst1.4@2238.01,386.65 Rst1.4@2226.69,375.34 ; J4.3@2065.12,369.07 2112.76,370 2221.35,370 Rst1.4@2226.69,375.34 ; R24.1@2226.69,197.77 Rst1.4@2226.69,375.34
RFVDD: C26.1 C31.1 FB2.2 U3.9 | length 292.3
  Top Layer w8: FB2.2@1769.83,660.46 FB2.2@1769,659.63 FB2.2@1772.94,659.63 ; C26.1@1838.1,660.46 C26.1@1853.64,676 ; 1859.9,837.21 1861.21,838.53 U3.9@1861.21,869.76
  Top Layer w20: FB2.2@1769.83,660.46 C26.1@1838.1,660.46 ; C26.1@1853.64,676 1853.82,676.18 1853.82,763.82 1859.9,769.9 1859.9,837.21
SRP: C10.1 L1.2 R25.1 U1.10 | length 575.6
  Top Layer w10: U1.10@558.9,1066.16 594.06,1066.16 635.08,1107.18 C10.1@640,1107.18
  Top Layer w20: C10.1@640,1107.18 647.97,1099.21 717.28,1099.21 R25.1@725,1091.5 787.28,1091.5 799,1103.21 799,1244 777.25,1265.75 777.25,1315.05 740.8,1351.5 L1.2@706,1351.5
STAT1: LED1.C U1.3 | length 57
  Top Layer w10: LED1.C@367.5,1058 397.43,1058 405.07,1065.65 420.59,1065.65 U1.3@421.1,1066.16
STAT2: LED2.C U1.5 | length 223.3
  Top Layer w10: LED2.C@426,823.5 426,885.55 407.6,903.96 407.6,961.33 442.62,996.35 459.96,996.35 460.47,996.87 U1.5@460.47,1007.1
SW1: L2.1 U2.3 | length 197.7
  Top Layer w10: 1155.52,1605.37 1156.16,1606 ; 1186.02,1605.87 1187.16,1607 U2.3@1217.11,1607
  Top Layer w20: L2.1@1045,1654.06 1096.18,1654.06 1107.83,1642.4 1107.83,1635.17 1137,1606 1156.16,1606 1156.29,1605.87 1186.02,1605.87
SW2: L2.2 U2.4 | length 271.1
  Top Layer w8: L2.2@1045,1535.94 L2.2@1046.94,1534 ; 1179,1568 1196.31,1585.31 1215.1,1585.31 U2.4@1217.11,1587.32
  Top Layer w20: L2.2@986.06,1535.94 L2.2@1045,1535.94 ; L2.2@1046.94,1534 1141.31,1534 1146,1538.69 1146,1568 1179,1568
T_SENSE: R6.1 R10.2 RT1.2 U1.4 | length 215
  Top Layer w10: R10.2@361.5,1006 R10.2@368,1006 ; RT1.2@366,877.5 370.75,882.25 370.75,931.25 R6.1@375.5,936 368.5,943 368.5,1005.5 R10.2@368,1006 ; U1.4@421.1,1046.47 420.59,1045.96 410.35,1045.96 395.54,1031.15 387.81,1031.15 368,1011.34 R10.2@368,1006
TP_SCLK: J4.8 U3.1 | length 548.5
  Top Layer w8: U3.1@1703.73,869.76 1703.73,790.33 1698,784.6 1698,574 1794.39,477.61 1896.34,477.61 J4.8@1904.88,469.07
TP_SWDIO: J4.7 U3.2 | length 724.6
  Top Layer w8: U3.2@1723.42,869.76 1723.42,790.22 1712,778.8 1712,581 1742.52,550.48 1952.84,550.48 1975.53,527.79 1975.53,473.75 1980.21,469.07 J4.7@2065.12,469.07
TP_SWO: J4.6 U3.3 | length 1013.6
  Top Layer w8: U3.3@1743.1,869.76 1743.1,790.1 1726,773 1726,591.49 1753.01,564.48 1958.64,564.48 1989.53,533.58 1989.53,515.29 2010.32,494.5 2119.05,494.5 2130.04,483.51 2130.04,454.63 2119.05,443.64 2010.32,443.64 1985.75,419.07 J4.6@1904.88,419.07
VC: C12.2 U2.10 | length 112
  Top Layer w8: C12.2@1366.82,1748 1374.5,1740.32 1374.5,1648.37 1376.5,1646.37 U2.10@1382.89,1646.37
VC_RC: C12.1 R14.1 | length 71.3
  Top Layer w8: C12.1@1469.18,1748 1477.68,1756.5 R14.1@1537,1756.5
pads on no net: J2.2 J2.3 J2.4 J4.4 J4.5 J4.9 J4.10 U3.4 U3.5 U3.6 U3.7 U3.8 U3.13 U3.21 U3.22 U3.23 U3.27 U3.28 U3.29 U3.30 U3.35 U3.36 U3.43 U3.44 U4.2 U5.3 U5.8 U5.13 U5.15 U5.16

## Polygon pours and split planes (outlines as drawn)
GND on Top Layer "GND" (solid, pour order 6): 1968,986 2058.1,1037 2416,1037 2416,1908 2632,1908 2632,15 2631,16 2305,16 2305,880 1968,880
GND on Top Layer "GND" (solid, pour order 7): 2290.01,1004 2434.03,1103.42 2430.29,1006.84
+3V3_VIN on Top Layer "+3V3_VIN_L01_P000" (solid, pour order 0): 1302.28,1423.93 1302.28,1573.54 1405.63,1573.54 1405.63,1423.93
GND on Bottom Layer "GND_L02_P001" (solid, pour order 1): 0,1923 0,0 2632,0 2632,1923

## Silkscreen, mask and mechanical layers (free items; w line width, h text height)
Mechanical 13:
  lines w10: 64,1695 804,1695 804,1902 64,1902 64,1695
  text "Twitch Switch" at 90,1854 h30
  text "Kyle Bryan and Morgan Tilong" at 88,1811.33 h25
  text "CU Boulder ECEN5833" at 86,1771 h20
  text "April 2021" at 88,1734.66 h20

## Text inside footprints (layer, text, board x,y; h text height)
J2: Mechanical 13 "pcb edge" at 435.71,3.85 h24.8